# Altium PCB ROS_CAR.PcbDoc (part 12 of 13)
Units mil, origin at the board's own origin, x right, y up, seen from the top; angles counter-clockwise.
Board outline 3937.01 x 3937.01 mil, 2 copper layers (Top Layer, Bottom Layer); 201 components, 155 nets, 998 pads, 0 vias.
Unrouted connection lines stored in the file: 3.
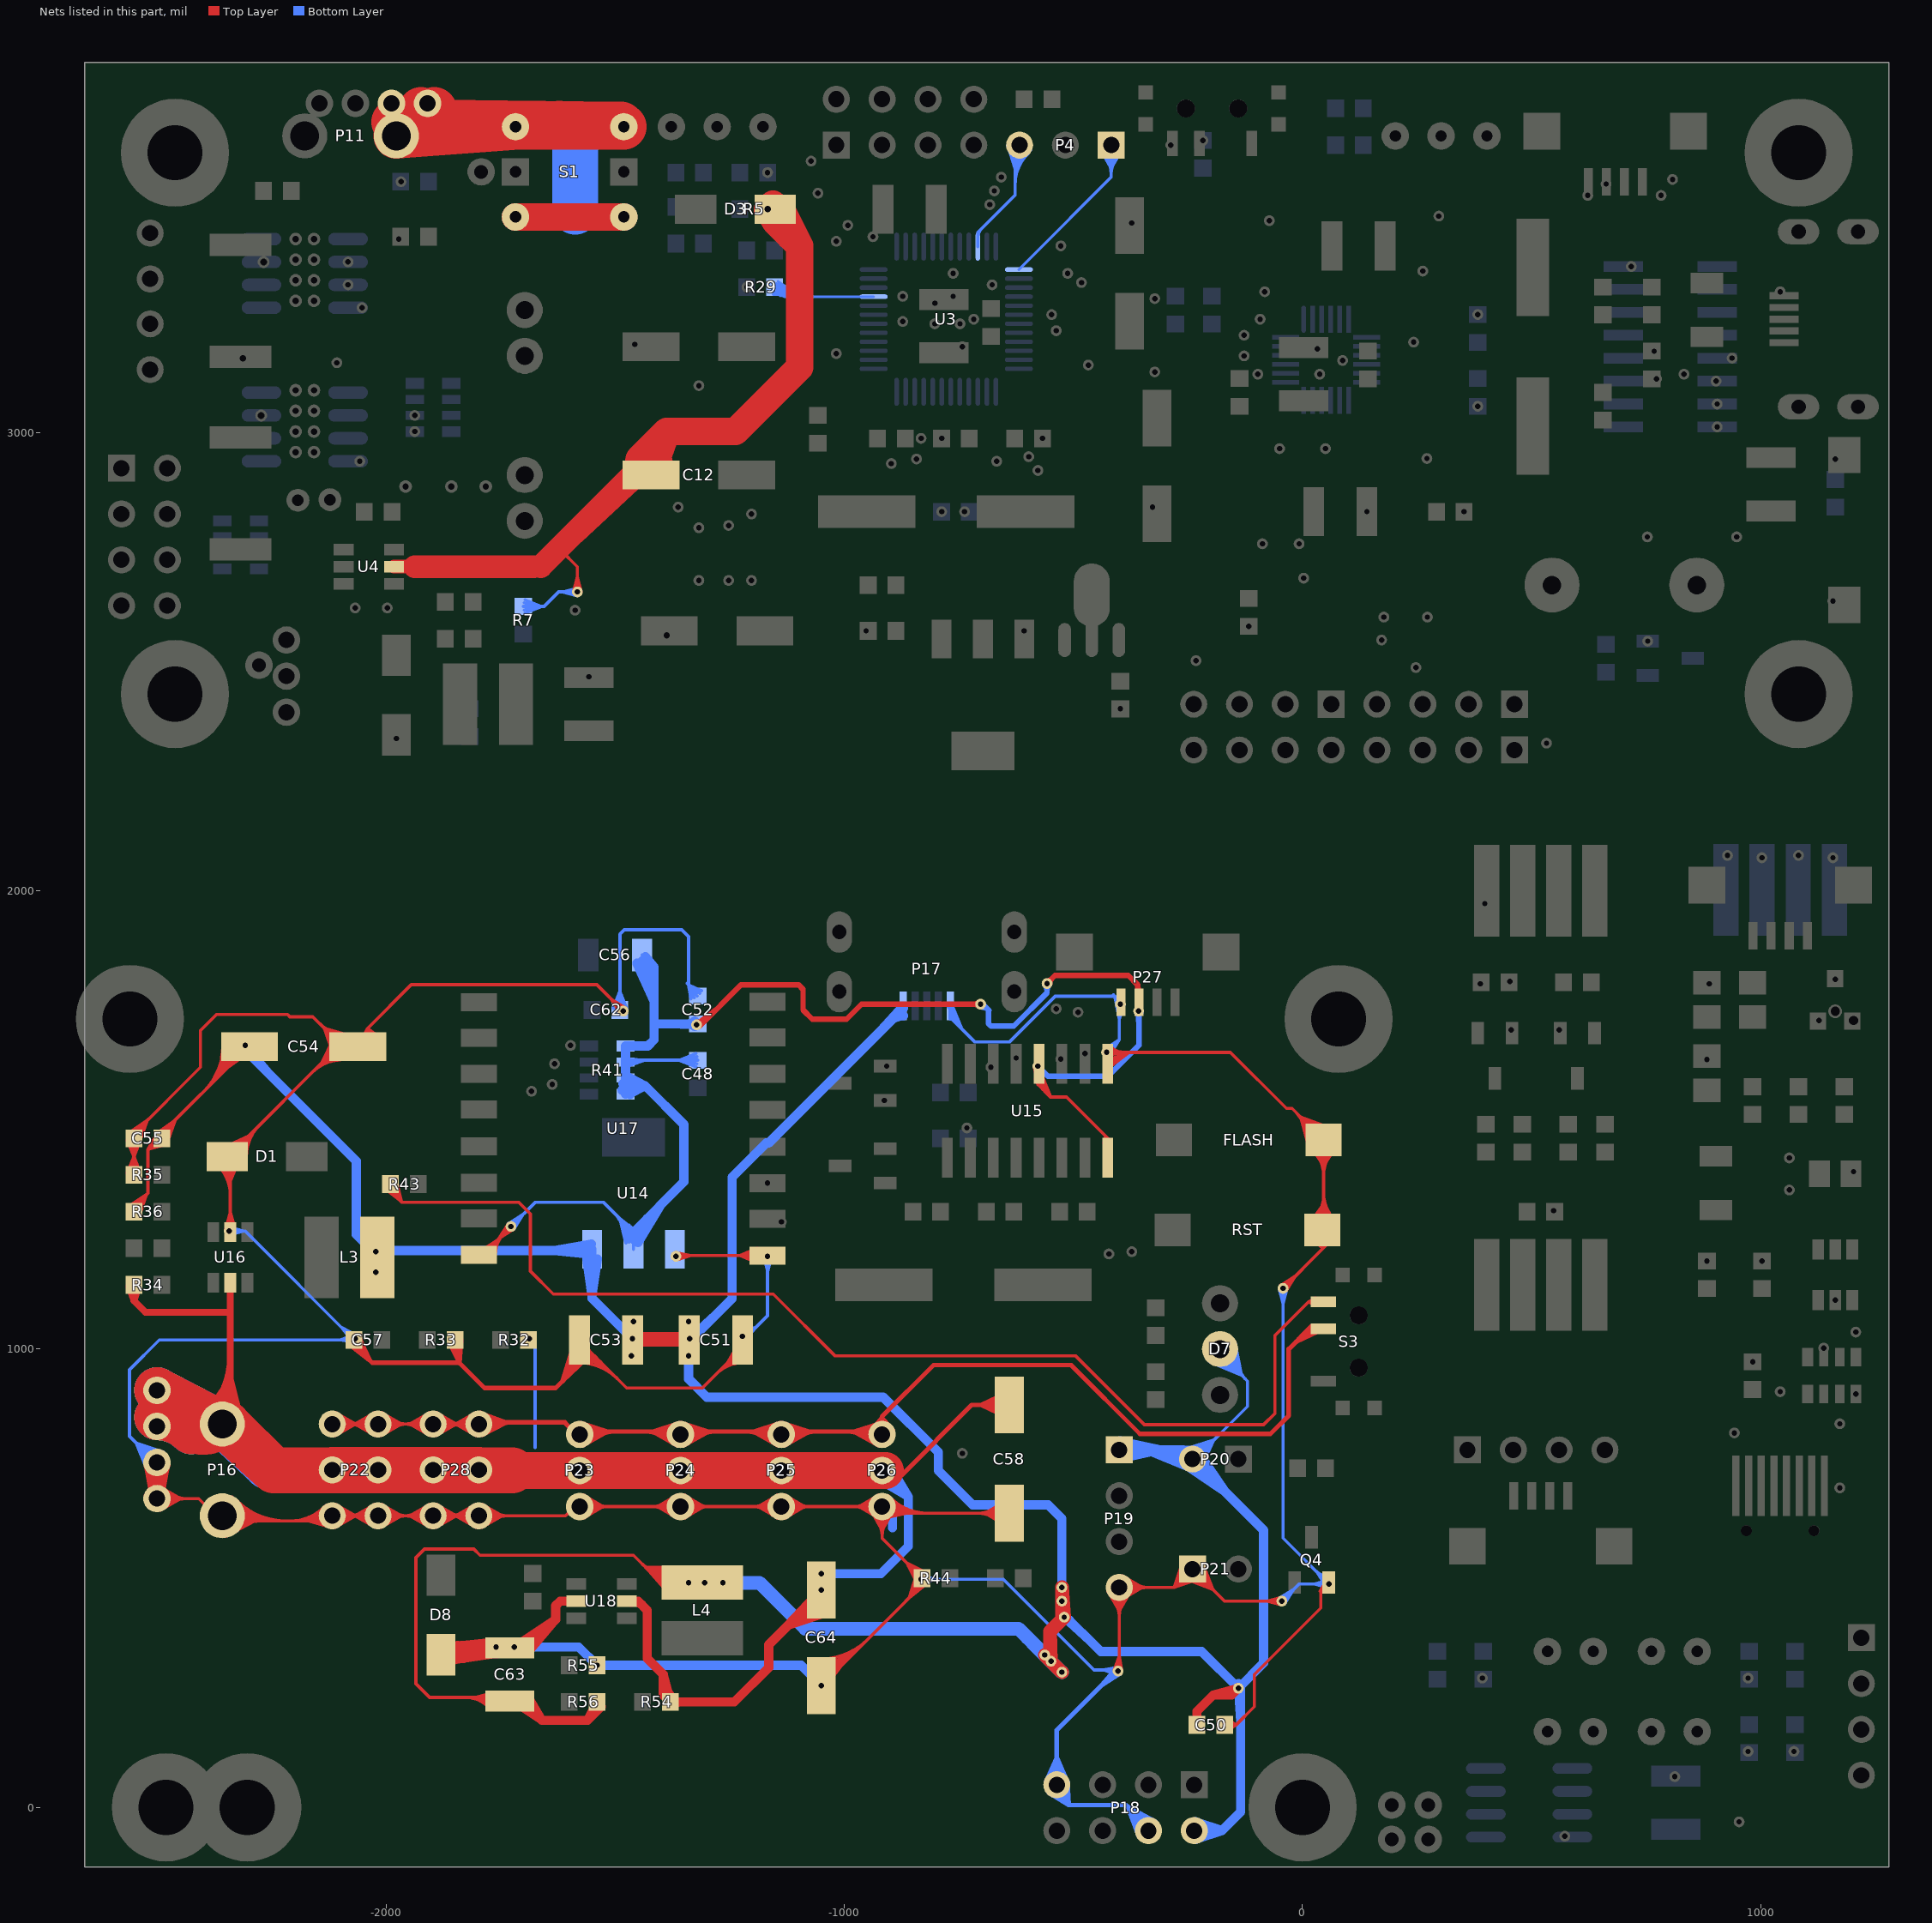
[diagram p12: the nets of this part, all layers, seen from the top]

## Nets (pads, with @x,y where several pads share a name; then routed paths per layer and width w, separated by ;. In a path a pad name is that pad's centre, name@x,y a point inside that pad or via, vN(x,y) a via of type N, cw(c..) or ccw(c..) an arc to the next point about the centre after c; other vN are vias at no path point) (continued)
SGND: (continued)
  Bottom Layer w7: -2549.54,799.54 ccw(c-2500,849.08) pad.0@-2500,779.02 ; -2543.46,793.46 cw(c-2584.39,752.52) pad.0@-2526.5,752.52 ; -2537.59,787.59 ccw(c-2500,825.18) pad.0@-2500,772.02 ; -2531.51,781.51 cw(c-2560.49,752.52) pad.0@-2519.5,752.52 ; -2525.64,775.64 ccw(c-2500,801.28) pad.0@-2500,765.02 ; pad.0@-2521.86,737.55 -2545.49,795.49 ; pad.0@-2515.44,740.6 -2545.49,795.49 ; pad.0@-2509.45,744.34 -2545.49,795.49 ; pad.0@-2503.95,748.69 -2545.49,795.49 ; pad.0@-2496.4,756.68 -2545.49,795.49 ; pad.0@-2492.37,762.42 -2545.49,795.49 ; pad.0@-2488.98,768.61 -2545.49,795.49 ; pad.0@-2486.29,775.2 -2545.49,795.49 ; pad.1@-2342.5,1257.5 -2307.5,1257.5 -2070,1020 -2495,1020 -2560,955 -2560,810 -2502.52,752.52 pad.0@-2500,752.52 -2545.49,795.49 ; pad.1@-2341.45,1249.26 -2309.69,1257.5 pad.1@-2341.45,1265.74 ; pad.1@-2336.62,1251.62 cw(c-2322.44,1237.44) -2322.44,1257.5 cw(c-2322.44,1277.56) pad.1@-2336.62,1263.38 ; -2093.6,1020 ccw(c-2093.6,1048.6) pad.1@-2073.38,1028.38 ; -2090.22,1040.22 ccw(c-2067.5,1062.95) pad.1@-2067.5,1030.81 ; -2081.53,1020 cw(c-2081.53,1008.47) pad.1@-2073.38,1016.62 ; -2078.27,1028.27 ccw(c-2067.5,1039.05) pad.1@-2067.5,1023.81 ; -2078.15,1028.15 cw(c-2083.8,1022.5) pad.1@-2075.81,1022.5 ; pad.1@-2073.47,1016.72 -2096.78,1046.78 ; pad.1@-2069.16,1030.64 -2100.62,1020 ; pad.1@-2067.92,1014.2 -2100.62,1020 ; pad.1@-2062.93,1029.44 -2096.78,1046.78 ; C62.2@-1504.23,1743.77 -1489.68,1780.29 ; C62.2@-1500.16,1751.45 ccw(c-1525.43,1776.73) -1489.69,1776.73 ccw(c-1453.94,1776.73) C62.2@-1479.21,1751.45 ; C62.2@-1497.45,1741.76 -1489.68,1780.29 ; C62.2@-1495.21,1746.5 ccw(c-1508.53,1759.83) -1489.69,1759.83 ccw(c-1470.84,1759.83) C62.2@-1484.16,1746.5 ; C62.2@-1490.81,1737.25 -1487.64,1770.16 ; C62.2@-1490.81,1737.44 -1486.93,1773.37 ; C62.2@-1489.68,1740 -1489.68,1905.32 -1480,1915 -1355,1915 -1340,1900 -1340,1795 ; C62.2@-1489.68,1740.98 -1489.68,1780.29 ; C62.2@-1489.68,1758.01 ccw(c-1461.99,1758.01) C62.2@-1481.57,1738.43 ; -1489.68,1774.91 ccw(c-1445.09,1774.91) C62.2@-1476.62,1743.38 ; C62.2@-1481.92,1741.76 -1489.68,1780.29 ; C62.2@-1475.14,1743.77 -1489.68,1780.29 ; C62.2@-1474.61,1740.11 -1489.68,1772.46 ; C62.2@-1474.62,1740.16 -1489.68,1771.8 ; C62.2@-1474.52,1739.81 -1487.64,1770.16 ; C62.2@-1474.42,1739.46 -1486.93,1773.37 ; -1342.83,1797.83 cw(c-1361.91,1778.75) C52.2@-1335.49,1773.3 ; -1336.58,1791.58 ccw(c-1320.98,1807.18) C52.2@-1320.98,1785.12 ; C52.2@-1334.53,1764.32 -1340,1795 ; -1333.65,1788.65 cw(c-1346.69,1775.61) C52.2@-1328.63,1771.89 ; C52.2@-1327.72,1766.36 -1340,1795 ; C52.2@-1325,1780 -1340,1795 ; C52.2@-1320.98,1770.32 -1340,1795 ; C52.2@-1315.45,1775.82 -1340,1795 ; C52.2@-1311.74,1781.88 -1340,1795 ; pad.1@-1226.14,1035.11 -1190.79,1049.21 ; pad.1@-1222.23,1027.77 -1190.79,1049.21 ; pad.1@-1222.23,1029.08 ccw(c-1222.23,1056.39) -1202.92,1037.08 ; pad.1@-1222.23,1036.08 ccw(c-1222.23,1080.29) -1190.97,1049.03 ; pad.1@-1216.83,1021.46 -1190.79,1049.21 ; pad.1@-1215,1025 -1167.5,1072.5 pad.1@-1167.5,1202.5 ; pad.1@-1175.74,1201.45 -1167.5,1169.69 pad.1@-1159.26,1201.45 ; pad.1@-1173.38,1196.62 cw(c-1187.56,1182.44) -1167.5,1182.44 cw(c-1147.44,1182.44) pad.1@-1161.62,1196.62 ; pad.1@-832.5,497.5 -652.5,497.5 -455,300 pad.1@-405,300 ; pad.1@-831.45,489.26 -799.69,497.5 pad.1@-831.45,505.74 ; pad.1@-826.62,491.62 cw(c-812.44,477.44) -812.44,497.5 cw(c-812.44,517.56) pad.1@-826.62,503.38 ; P17.1@-772.64,1746.37 -743.1,1698.1 ; P17.1@-768.82,1720.51 cw(c-768.82,1712.51) P17.1@-763.17,1718.17 ; P17.1@-764.85,1750.34 -743.1,1698.1 ; P17.1@-764.44,1724.88 ccw(c-751.32,1724.88) -760.6,1715.6 ; pad.1@-432.69,1653.99 -400.84,1674.16 ; pad.1@-430,1645 -400,1675 -400,1760 -410,1770 ; -428.6,300 cw(c-428.6,271.4) pad.1@-408.38,291.62 ; pad.1@-427.5,1647.5 -400.84,1674.16 ; pad.1@-427.5,1655.81 ccw(c-427.5,1675.88) -413.31,1661.69 ccw(c-399.12,1647.5) pad.1@-419.19,1647.5 ; pad.1@-421.01,1642.31 -400.84,1674.16 ; -416.53,300 ccw(c-416.53,311.53) pad.1@-408.38,303.38 ; -412.5,1772.5 cw(c-429.09,1755.91) pad.1@-405.76,1753.39 ; pad.1@-405.8,1752.08 -400,1719.57 ; pad.1@-405.07,1749.07 -410,1770 ; pad.1@-404.16,289.36 -435.51,300 ; pad.1@-403.38,1746.62 cw(c-411.53,1738.47) -400,1738.47 ; -403.15,1763.15 ccw(c-397.5,1768.8) pad.1@-397.5,1760.81 ; pad.1@-402.92,305.8 -435.51,300 ; pad.1@-402.5,297.5 -435.51,300 ; -400,1726.4 cw(c-371.4,1726.4) pad.1@-391.62,1746.62 ; pad.1@-391.8,1758.55 -410,1770 ; pad.1@-389.36,1750.83 -400,1719.57 ; pad.1@-50.74,1131.45 -42.5,1099.69 pad.1@-34.26,1131.45 ; pad.1@-50.19,456.49 -18.34,476.66 pad.1@-38.51,444.81 ; pad.1@-48.38,1126.62 cw(c-62.56,1112.44) -42.5,1112.44 cw(c-22.44,1112.44) pad.1@-36.62,1126.62 ; pad.1@-45,450 -7.5,487.5 pad.1@57.5,487.5 -42.5,587.5 pad.1@-42.5,1132.5 ; pad.1@-45,458.31 ccw(c-45,478.38) -30.81,464.19 ccw(c-16.62,450) pad.1@-36.69,450 ; pad.1@49.19,487.5 ccw(c29.12,487.5) 43.31,501.69 ccw(c57.5,515.88) pad.1@57.5,495.81 ; pad.1@51.01,482.31 30.84,514.16 pad.1@62.69,493.99 ; pad.1@51.62,481.62 ccw(c37.44,467.44) 37.44,487.5 ccw(c37.44,507.56) pad.1@51.62,493.38 ; pad.1@56.45,479.26 24.69,487.5 pad.1@56.45,495.74 ; -2100.62,1020 pad.1@-2067.5,1022.5 -2096.78,1046.78 ; -1489.68,1771.8 pad.1@-1482.5,1737.5 ; -1489.68,1771.8 -1490.78,1736.77 -1489.68,1772.46 ; -1489.68,1772.46 pad.1@-1482.5,1737.5 ; -1487.64,1770.16 pad.1@-1482.5,1737.5 ; -1486.93,1773.37 pad.1@-1482.5,1737.5 ; -743.1,1698.1 P17.1@-768.82,1748.5 -768.82,1723.82 -715,1670 -640,1670 -540,1770 -410,1770 ; -410,1770 pad.1@-397.5,1752.5 -400,1719.57
  Bottom Layer w10: P18.4@-560.22,54.33 -536.22,108.8 ; P18.4@-553.74,32.11 -510,5 ; P18.4@-553.56,66.62 ccw(c-595.44,108.49) -536.22,108.49 ccw(c-477.01,108.49) P18.4@-518.88,66.62 ; P18.4@-550.64,51.05 -536.22,108.8 ; P18.4@-547.55,40.18 -510,5 ; P18.4@-546.49,59.55 ccw(c-571.29,84.35) -536.22,84.35 ccw(c-501.15,84.35) P18.4@-525.95,59.55 ; P18.4@-536.22,24.75 cw(c-536.22,9.12) -525.17,20.17 ; P18.4@-522.8,54.84 -510,5 ; P18.4@-521.8,51.05 -536.22,108.8 ; P18.4@-512.75,56.38 -510,5 ; P18.4@-512.22,54.33 -536.22,108.8 ; -422.66,282.34 cw(c-402.5,262.17) pad.1@-402.5,290.69 ; pad.1@-407.3,302.33 -438.03,266.97 ; pad.1@-405,300 -536.22,168.78 -536.22,31.22 -510,5 ; pad.1@-402.5,297.5 -438.03,266.97 ; pad.1@-398.45,292.02 -438.03,266.97 ; -383,3 cw(c-436.73,-50.72) P18.6@-360.75,-50.72 ; -366.24,-13.76 ccw(c-336.22,16.25) P18.6@-336.22,-26.2 ; -365.93,-14.07 cw(c-402.59,-50.72) P18.6@-350.75,-50.72 ; P18.6@-357.3,-63.27 -381.7,1.7 ; P18.6@-348.13,-59.04 -381.7,1.7 ; P18.6@-326.3,-40.11 -381.7,1.7 ; P18.6@-320.82,-31.63 -381.7,1.7 ; -536.22,108.8 P18.4@-536.22,49.28 -510,5 ; -510,5 -385,5 -336.22,-43.78 P18.6@-336.22,-50.72 -381.7,1.7
  Bottom Layer w20: pad.1@-1760,350 -1579.68,350 pad.1@-1539.68,310 -1094.33,310 pad.1@-1050,265.67 ; -895,610 P26.1@-895,638.91
SIG: P22.5 P22.6 P23.3 P24.3 P25.3 P26.3 P28.5 P28.6 S3.2 | length 9681.6
  Top Layer w7: P22.6@-2117.48,836.38 -1808.62,836.38 P28.5@-1805,840 ; P22.6@-2117.23,831.36 -2066.95,836.38 ; P22.6@-2117.23,841.4 -2066.95,836.38 ; P22.6@-2116.05,824.44 -2066.95,836.38 ; P22.6@-2116.05,848.32 -2066.95,836.38 ; P22.6@-2113.9,817.69 -2066.95,836.38 ; P22.6@-2113.9,855.07 -2066.95,836.38 ; P22.6@-2110.78,811.23 -2066.95,836.38 ; P22.6@-2110.78,861.53 -2066.95,836.38 ; P22.6@-2104.03,822.92 cw(c-2071.54,790.44) -2071.54,836.38 cw(c-2071.54,882.31) P22.6@-2104.03,849.83 ; P22.6@-2099.08,817.97 cw(c-2054.64,773.54) -2054.64,836.38 cw(c-2054.64,899.21) P22.6@-2099.08,854.78 ; P22.5@-2035.88,817.97 ccw(c-2080.32,773.54) -2080.32,836.38 ccw(c-2080.32,899.21) P22.5@-2035.88,854.78 ; P22.5@-2030.93,822.92 ccw(c-2063.42,790.44) -2063.42,836.38 ccw(c-2063.42,882.31) P22.5@-2030.93,849.83 ; P22.5@-2024.18,811.23 -2068.01,836.38 ; P22.5@-2024.18,861.53 -2068.01,836.38 ; P22.5@-2021.06,817.69 -2068.01,836.38 ; P22.5@-2021.06,855.07 -2068.01,836.38 ; P22.5@-2018.91,824.44 -2068.01,836.38 ; P22.5@-2018.91,848.32 -2068.01,836.38 ; P22.5@-2017.73,831.36 -2068.01,836.38 ; P22.5@-2017.73,841.4 -2068.01,836.38 ; P22.5@-2017.23,831.36 -1966.95,836.38 ; P22.5@-2017.23,841.4 -1966.95,836.38 ; P22.5@-2016.05,824.44 -1966.95,836.38 ; P22.5@-2016.05,848.32 -1966.95,836.38 ; P22.5@-2013.9,817.69 -1966.95,836.38 ; P22.5@-2013.9,855.07 -1966.95,836.38 ; P22.5@-2010.78,811.23 -1966.95,836.38 ; P22.5@-2010.78,861.53 -1966.95,836.38 ; P22.5@-2004.03,822.92 cw(c-1971.54,790.44) -1971.54,836.38 cw(c-1971.54,882.31) P22.5@-2004.03,849.83 ; P22.5@-1999.08,817.97 cw(c-1954.64,773.54) -1954.64,836.38 cw(c-1954.64,899.21) P22.5@-1999.08,854.78 ; P28.6@-1915.88,817.97 ccw(c-1960.32,773.54) -1960.32,836.38 ccw(c-1960.32,899.21) P28.6@-1915.88,854.78 ; P28.6@-1910.93,822.92 ccw(c-1943.42,790.44) -1943.42,836.38 ccw(c-1943.42,882.31) P28.6@-1910.93,849.83 ; P28.6@-1904.18,811.23 -1948.01,836.38 ; P28.6@-1904.18,861.53 -1948.01,836.38 ; P28.6@-1901.06,817.69 -1948.01,836.38 ; P28.6@-1901.06,855.07 -1948.01,836.38 ; P28.6@-1898.91,824.44 -1948.01,836.38 ; P28.6@-1898.91,848.32 -1948.01,836.38 ; P28.6@-1897.73,831.36 -1948.01,836.38 ; P28.6@-1897.73,841.4 -1948.01,836.38 ; P28.6@-1897.23,831.36 -1846.95,836.38 ; P28.6@-1897.23,841.4 -1846.95,836.38 ; P28.6@-1896.05,824.44 -1846.95,836.38 ; P28.6@-1896.05,848.32 -1846.95,836.38 ; P28.6@-1893.9,817.69 -1846.95,836.38 ; P28.6@-1893.9,855.07 -1846.95,836.38 ; P28.6@-1890.78,811.23 -1846.95,836.38 ; P28.6@-1890.78,861.53 -1846.95,836.38 ; P28.6@-1884.03,822.92 cw(c-1851.54,790.44) -1851.54,836.38 cw(c-1851.54,882.31) P28.6@-1884.03,849.83 ; P28.6@-1879.08,817.97 cw(c-1834.64,773.54) -1834.64,836.38 cw(c-1834.64,899.21) P28.6@-1879.08,854.78 ; P28.5@-1815.88,817.97 ccw(c-1860.32,773.54) -1860.32,836.38 ccw(c-1860.32,899.21) P28.5@-1815.88,854.78 ; P28.5@-1810.93,822.92 ccw(c-1843.42,790.44) -1843.42,836.38 ccw(c-1843.42,882.31) P28.5@-1810.93,849.83 ; P28.5@-1804.18,811.23 -1848.01,836.38 ; P28.5@-1804.18,861.53 -1848.01,836.38 ; P28.5@-1801.06,817.69 -1848.01,836.38 ; P28.5@-1801.06,855.07 -1848.01,836.38 ; P28.5@-1798.91,824.44 -1848.01,836.38 ; P28.5@-1798.91,848.32 -1848.01,836.38 ; P28.5@-1797.73,831.36 -1848.01,836.38 ; P28.5@-1797.73,841.4 -1848.01,836.38 ; P28.5@-1797.48,836.38 -1848.01,836.38 ; P26.3@-942.38,822.94 -917.48,852.52 ; P26.3@-936.35,818.78 -917.48,852.52 ; P26.3@-935,820 -917.48,837.52 -917.48,852.52 ; P26.3@-929.82,815.88 -917.48,852.52 ; P26.3@-927.04,838.57 ccw(c-932.43,852.52) -917.48,852.52 ; P26.3@-922.97,814.25 -917.48,852.52 ; P26.3@-917.48,813.86 -917.48,852.52 ; P26.3@-911.99,814.25 -917.48,852.52 ; P26.3@-907.92,838.57 cw(c-902.53,852.52) -917.48,852.52 ; P26.3@-905.14,815.88 -917.48,852.52 ; P26.3@-898.61,818.78 -917.48,852.52 ; P26.3@-892.59,822.94 -917.48,852.52 ; S3.2@20,1050 S3.2@35,1050
  Top Layer w10: P28.5@-1805,840 -1610,840 -1590,820 P26.3@-935,820 ; P28.5@-1797.48,836.38 -1737.83,840 ; P28.5@-1796.59,850.88 -1737.83,840 ; P28.5@-1794.84,822.09 -1737.83,840 ; P28.5@-1793.91,860.64 -1737.83,840 ; P28.5@-1791,812.72 -1737.83,840 ; P28.5@-1787.21,826.11 cw(c-1753.66,792.56) -1753.66,840 ; P28.5@-1780.14,819.03 cw(c-1729.52,768.42) -1729.52,840 ; P28.5@-1780.14,853.72 ccw(c-1747.01,886.85) -1747.01,840 ; P23.3@-1577.48,813.86 -1517.08,820 ; P23.3@-1577.14,828.85 -1517.08,820 ; P23.3@-1574.83,838.72 -1517.08,820 ; P23.3@-1574.13,799.24 -1517.08,820 ; P23.3@-1569.88,790.04 -1517.08,820 ; P23.3@-1566.87,803.25 cw(c-1526.44,762.82) -1526.44,820 ; P23.3@-1559.8,796.18 cw(c-1502.3,738.68) -1502.3,820 ; P23.3@-1559.8,831.54 ccw(c-1531.95,859.39) -1531.95,820 ; -1432.66,820 cw(c-1432.66,738.68) P24.3@-1375.16,796.18 ; -1408.52,820 cw(c-1408.52,762.82) P24.3@-1368.09,803.25 ; -1403.01,820 ccw(c-1403.01,859.39) P24.3@-1375.16,831.54 ; P24.3@-1365.07,790.04 -1417.95,820 ; P24.3@-1360.83,799.24 -1417.95,820 ; P24.3@-1360.12,838.72 -1417.95,820 ; P24.3@-1357.82,828.85 -1417.95,820 ; P24.3@-1357.14,828.85 -1296.94,820 ; P24.3@-1354.84,838.72 -1296.94,820 ; P24.3@-1354.14,799.24 -1296.94,820 ; P24.3@-1349.9,790.03 -1296.94,820 ; P24.3@-1346.87,803.25 cw(c-1306.44,762.82) -1306.44,820 ; P24.3@-1339.8,796.18 cw(c-1282.3,738.68) -1282.3,820 ; P24.3@-1339.8,831.54 ccw(c-1311.95,859.39) -1311.95,820 ; -1212.66,820 cw(c-1212.66,738.68) P25.3@-1155.16,796.18 ; -1188.52,820 cw(c-1188.52,762.82) P25.3@-1148.09,803.25 ; -1183.01,820 ccw(c-1183.01,859.39) P25.3@-1155.16,831.54 ; P25.3@-1145.06,790.03 -1198.02,820 ; P25.3@-1140.82,799.24 -1198.02,820 ; P25.3@-1140.12,838.72 -1198.02,820 ; P25.3@-1137.82,828.85 -1198.02,820 ; P25.3@-1137.14,828.85 -1077.03,820 ; P25.3@-1134.84,838.72 -1077.03,820 ; P25.3@-1134.13,799.24 -1077.03,820 ; P25.3@-1129.89,790.04 -1077.03,820 ; P25.3@-1126.87,803.25 cw(c-1086.44,762.82) -1086.44,820 ; P25.3@-1119.8,796.18 cw(c-1062.3,738.68) -1062.3,820 ; P25.3@-1119.8,831.54 ccw(c-1091.95,859.39) -1091.95,820 ; -992.66,820 cw(c-992.66,738.68) P26.3@-935.16,796.18 ; -968.52,820 cw(c-968.52,762.82) P26.3@-928.09,803.25 ; -963.01,820 ccw(c-963.01,859.39) P26.3@-935.16,831.54 ; P26.3@-924.97,790.01 -978.79,820 ; P26.3@-920.78,799.23 -978.79,820 ; P26.3@-920.09,838.72 -978.79,820 ; P26.3@-917.81,828.85 -978.79,820 ; P26.3@-917.48,813.86 -978.79,820 ; -917.48,852.52 -805,965 -505,965 -355,815 -70,815 -30,855 -30,1000 S3.2@20,1050 ; -9.05,1020.95 cw(c30,981.9) S3.2@30,1037.13 ; 8.02,1038.02 cw(c30,1016.05) S3.2@30,1047.13 ; S3.2@25.97,1049.43 -14.41,1015.59 ; S3.2@30,1043.94 -14.41,1015.59 ; S3.2@33.29,1037.97 -14.41,1015.59 ; -1417.95,820 P24.3@-1357.48,813.86 -1296.94,820 ; -1198.02,820 P25.3@-1137.48,813.86 -1077.03,820
SIG_T: R43.1 S3.3 | length 2896.9
  Top Layer w7: R43.1@-2001.31,1349.1 -1966.24,1321.24 ; R43.1@-1996.51,1354.26 -1966.24,1321.24 ; R43.1@-1990.31,1359.02 -1966.24,1321.24 ; R43.1@-1990.31,1360 -1990.31,1345.31 -1965,1320 -1710,1320 -1685,1295 -1685,1170 -1635,1120 -1155,1120 -1020,985 -495,985 -345,835 -85,835 -60,860 -60,1030 12.99,1102.99 ; R43.1@-1983.39,1362.62 -1966.24,1321.24 ; R43.1@-1983.17,1355.87 ccw(c-1965.21,1347.96) -1979.09,1334.09 ; R43.1@-1976.76,1353.05 ccw(c-1955.16,1343.54) -1971.85,1326.85 ; R43.1@-1976.68,1364.8 -1966.24,1321.24 ; S3.3@23.44,1097.89 ccw(c12.99,1089.75) 12.99,1102.99 ; S3.3@23.44,1108.1 cw(c12.99,1116.24) 12.99,1102.99 ; S3.3@27.97,1094.93 12.99,1102.99 ; S3.3@27.97,1111.05 12.99,1102.99 ; S3.3@30,1102.99 12.99,1102.99 ; S3.3@45.75,1102.99 12.99,1102.99
SVCC3.3: C48.2 C52.1 C56.1 P27.3 pad.1@-357.5,1737.5 pad.1@-557.5,1797.5 pad.1@-577.5,1617.5 pad.1@-702.5,1752.5 pad.1@-1322.5,1707.5 pad.1@-1727.5,1267.5 R41.1 R41.2 R41.3 R41.4 U14.2 U15.4 U15.16 U17.8 | length 7705.2
  Top Layer w7: U17.8@-1797.48,1205.59 -1789.41,1205.59 pad.1@-1727.5,1267.5 -1754.16,1240.84 ; U17.8@-1789.28,1217 -1757.41,1237.59 ; U17.8@-1784.89,1211.43 -1757.41,1237.59 ; U17.8@-1777.8,1205.59 -1757.41,1237.59 ; U17.8@-1777.8,1221.78 ccw(c-1777.8,1232.81) U17.8@-1769.99,1225.01 ; U17.8@-1775.61,1205.59 cw(c-1742.3,1205.59) -1765.85,1229.15 ; U17.8@-1769.51,1201.63 -1757.41,1237.59 ; U17.8@-1768.61,1205.59 cw(c-1718.4,1205.59) -1753.9,1241.1 ; U17.8@-1762.6,1200.01 -1757.41,1237.59 ; U17.8@-1761.61,1205.59 cw(c-1694.5,1205.59) -1741.95,1253.05 ; pad.1@-1735.81,1267.5 cw(c-1755.88,1267.5) -1741.69,1253.31 cw(c-1727.5,1239.12) pad.1@-1727.5,1259.19 ; pad.1@-1733.99,1272.69 -1754.16,1240.84 ; pad.1@-1722.31,1261.01 -1754.16,1240.84 ; U15.4@-585.74,1616.45 -577.5,1584.69 U15.4@-569.26,1616.45 ; U15.4@-583.38,1611.62 cw(c-597.56,1597.44) -577.5,1597.44 cw(c-557.44,1597.44) U15.4@-571.62,1611.62 ; U15.4@-581.69,1585.93 -550,1550 ; U15.4@-580.74,1584.86 cw(c-588,1577.27) -577.5,1577.27 cw(c-571.85,1577.27) U15.4@-573.13,1582.77 ; U15.4@-580.55,1592.13 ccw(c-563.47,1588.24) -575.85,1575.85 ; pad.1@-577.5,1617.5 -577.5,1577.5 ; U15.4@-573.72,1590.57 ccw(c-548.87,1584.91) -566.89,1566.89 ; U15.4@-567.56,1594.57 -550,1550 ; U15.4@-566.9,1589.02 ccw(c-534.28,1581.59) -557.93,1557.93 ; U15.16@-433.3,1448.7 -430,1465 ; U15.16@-425,1417.64 -430,1422.64 -430,1465 ; U15.16@-425,1449.13 -430,1465 ; U15.16@-423.56,1457.32 cw(c-422.2,1465) -430,1465 ; U15.16@-417.95,1453.53 -430,1465 ; -577.5,1577.5 U15.4@-575,1590.87 ; -577.5,1577.5 -583.25,1589.82 -577.5,1577.5 ; -577.5,1577.5 -567.69,1586.91 -577.5,1577.5 ; -577.5,1577.5 U15.4@-575,1590.87 ; -577.5,1577.5 -550,1550 ; U15.4@-575,1590.87 -550,1550 ; -550,1550 -515,1550 -430,1465
  Top Layer w12: pad.1@-1322.5,1707.5 -1279.79,1740.21 ; pad.1@-1322.5,1713.31 ccw(c-1322.5,1751.48) -1295.51,1724.49 ; pad.1@-1315,1705 -1225,1795 -1100,1795 -1090,1785 -1090,1740 -1070,1720 -995,1720 -962.5,1752.5 pad.1@-702.5,1752.5 ; pad.1@-706.61,1748.39 ccw(c-716.53,1738.47) -716.53,1752.5 ccw(c-716.53,1766.53) pad.1@-706.61,1756.61 ; pad.1@-560,1795 -540,1815 -380,1815 -360,1795 ; pad.1@-557.5,1803.31 ccw(c-557.5,1817.34) -547.58,1807.42 ccw(c-537.66,1797.5) pad.1@-551.69,1797.5 ; P27.3@-360,1780 -360,1795 ; -360,1792.66 ccw(c-341.05,1792.66) P27.3@-354.45,1779.25 ; P27.3@-357.17,1776.54 -360,1795
  Bottom Layer w7: pad.1@-1732.69,1273.99 -1700.84,1294.16 ; pad.1@-1727.5,1267.5 -1700.84,1294.16 ; pad.1@-1727.5,1275.81 ccw(c-1727.5,1295.88) -1713.31,1281.69 ccw(c-1699.12,1267.5) pad.1@-1719.19,1267.5 ; pad.1@-1725,1270 -1675,1320 -1525,1320 -1460,1255 U14.2@-1460,1217.95 ; pad.1@-1721.01,1262.31 -1700.84,1294.16 ; -1502.57,1297.57 cw(c-1561.52,1238.62) U14.2@-1478.15,1238.62 ; -1490.62,1285.62 cw(c-1537.62,1238.62) U14.2@-1471.15,1238.62 ; -1478.67,1273.67 cw(c-1513.72,1238.62) U14.2@-1464.15,1238.62 ; U14.2@-1478.15,1238.09 -1470,1270 ; U14.2@-1476.63,1231.35 -1490.31,1285.31 ; U14.2@-1472.84,1251.46 ccw(c-1479.68,1258.31) U14.2@-1470,1258.31 ; U14.2@-1471.05,1237.08 -1470,1270 ; -1470,1262.2 ccw(c-1457.44,1262.2) U14.2@-1458.8,1249.71 ; R41.3@-1470,1625 -1464.68,1630.32 C48.2@-1320,1630.32 ; U14.2@-1469.92,1233.52 -1490.31,1285.31 ; R41.3@-1467.62,1632.88 -1435.7,1630.32 ; R41.3@-1467.48,1626.38 -1435.7,1630.32 ; -1466.72,1261.72 cw(c-1489.82,1238.62) U14.2@-1457.15,1238.62 ; R41.3@-1466.03,1620.04 -1435.7,1630.32 ; U14.2@-1465,1235 -1470,1240 -1470,1270 ; U14.2@-1464.03,1237.61 -1470,1270 ; U14.2@-1463.57,1236.49 -1490.31,1285.31 ; R41.3@-1462.88,1621.78 cw(c-1442.28,1601.18) -1442.28,1630.32 ; U14.2@-1458.04,1256.67 cw(c-1456.59,1270) -1470,1270 ; U14.2@-1456.6,1241.01 -1490.31,1285.31 ; U14.2@-1456.13,1240.13 -1470,1270 ; U14.2@-1451.3,1245.6 -1490.31,1285.31 ; U14.2@-1450.1,1243.76 -1470,1270 ; U14.2@-1446.59,1250.86 -1490.31,1285.31 ; U14.2@-1444.89,1248.69 -1470,1270 ; C56.1@-1444.38,1835.47 -1415,1833.66 ; C56.1@-1443.94,1828.25 -1415,1833.66 ; C56.1@-1443.11,1842.41 -1415,1833.66 ; C56.1@-1441.34,1846.81 -1415,1833.66 ; C56.1@-1441.34,1860 -1415,1833.66 ; C56.1@-1438.88,1850.87 -1415,1833.66 ; C56.1@-1435.64,1836.54 cw(c-1427.24,1821.37) -1414.97,1833.64 ; C56.1@-1434.1,1856.06 -1415,1833.66 ; C56.1@-1428.06,1860.04 -1415,1833.66 ; C56.1@-1422.59,1846.81 ccw(c-1409.18,1846.81) -1418.67,1837.33 ; -1415,1710 -1414.68,1709.68 ; C48.2@-1331.45,1619.84 ccw(c-1356.73,1594.57) -1356.73,1630.32 ccw(c-1356.73,1666.06) C48.2@-1331.45,1640.79 ; C48.2@-1326.5,1624.79 ccw(c-1339.83,1611.47) -1339.83,1630.32 ccw(c-1339.83,1649.16) C48.2@-1326.5,1635.84 ; C48.2@-1323.77,1615.77 -1360.29,1630.32 ; C48.2@-1323.77,1644.86 -1360.29,1630.32 ; C48.2@-1321.76,1622.55 -1360.29,1630.32 ; C48.2@-1321.76,1638.08 -1360.29,1630.32 ; C48.2@-1320.98,1630.32 -1360.29,1630.32 ; -1490.31,1285.31 -1460,1238.62 -1470,1270
  Bottom Layer w12: pad.1@-702.5,1746.69 cw(c-702.5,1720.59) -684.04,1739.04 ; pad.1@-702.5,1752.5 -685,1740 ; pad.1@-700,1755 -685,1740 ; pad.1@-577.5,1611.69 cw(c-577.5,1597.66) -567.58,1607.58 cw(c-557.66,1617.5) pad.1@-571.69,1617.5 ; pad.1@-577.5,1617.5 -555,1595 ; pad.1@-575,1622.36 -575,1615 -555,1595 ; pad.1@-561.61,1793.39 cw(c-571.53,1783.47) -557.5,1783.47 cw(c-543.47,1783.47) pad.1@-553.39,1793.39 ; pad.1@-361.61,1733.39 cw(c-372.34,1722.66) -357.17,1722.66 ; -357.17,1689.69 pad.1@-357.5,1737.5 -357.17,1737.17 -357.17,1662.83 -425,1595 -555,1595 ; -357.17,1724.28 cw(c-344.28,1724.28) pad.1@-353.39,1733.39 ; -685,1740 -685,1710 -680,1705 -630,1705 -557.5,1777.5 ; -557.5,1777.5 pad.1@-557.5,1797.5 -557.5,1777.5
  Bottom Layer w20: R41.1@-1485.29,1565.03 cw(c-1468.56,1555.98) -1468.56,1575 ; -1483.56,1579.49 ccw(c-1474.66,1586.06) -1474.66,1575 ; R41.1@-1469.29,1556.38 -1435,1575 ; R41.4@-1469.29,1661.38 -1428.62,1661.38 ; U14.2@-1468.72,1246.35 -1401.23,1313.77 ; R41.1@-1467.7,1555.52 cw(c-1435,1537.82) -1435,1575 ; U14.2@-1460,1238.62 -1401.23,1313.77 ; U14.2@-1460,1255 -1350,1365 -1350,1490 -1435,1575 ; C56.1@-1452.81,1842.53 -1415,1758.66 ; U14.2@-1450.4,1232.02 -1401.23,1313.77 ; C56.1@-1450,1838.15 cw(c-1534.49,1753.66) -1415,1753.66 ; U14.2@-1448.35,1238.62 cw(c-1380.67,1238.62) -1428.53,1286.47 ; C56.1@-1444.41,1834.96 -1415,1833.66 ; C56.1@-1435.85,1852.3 cw(c-1486.2,1801.95) -1415,1801.95 ; C56.1@-1433.71,1856.39 -1415,1833.66 ; C56.1@-1429.4,1849.53 -1415,1758.66 ; -1414.68,1709.68 C52.1@-1320,1709.68 ; -1399.29,1709.68 C52.1@-1320.98,1709.68 ; C52.1@-1326.86,1703.81 ccw(c-1341.04,1689.63) -1341.04,1709.68 ccw(c-1341.04,1729.74) C52.1@-1326.86,1715.56 ; R41.1@-1477.48,1556.38 -1477.48,1575 ; R41.1@-1477.48,1556.38 R41.2@-1477.48,1591.38 -1477.48,1575 ; R41.1@-1477.48,1556.38 -1477.48,1575 ; R41.1@-1477.48,1556.38 R41.4@-1477.48,1661.38 -1428.62,1661.38 ; -1477.48,1575 -1435,1575 ; -1435,1575 cw(c-1435,1615.39) -1467.48,1591.38 -1435,1575 ; -1428.62,1661.38 -1415,1675 -1415,1833.66 ; -1415,1758.66 -1441.34,1846.81 -1415,1833.66 ; -1394.44,1709.68 pad.1@-1322.5,1707.5 -1394.44,1709.68
SVCC5: C50.1 C51.2 C53.1 C54.1 C55.2 C63.1 D7.2 L3.2 L4.2 P17.5 P18.5 P19.1 P20.2 pad.1@-140,260 pad.1@-520,415 pad.1@-525,295 pad.1@-525,450 pad.1@-525,480 pad.1@-548.9,318.9 pad.1@-562.5,332.5 pad.1@-1265,490 pad.1@-1305,490 pad.1@-1337.5,1022.5 pad.1@-1340,490 pad.1@-1340,985 pad.1@-1340,1060 pad.1@-1460,1060 pad.1@-1462.5,1022.5 pad.1@-1465,985 pad.1@-2022.5,1167.5 pad.1@-2022.5,1212.5 pad.1@-2307.5,1662.5 R36.1 R56.1 U14.3 | length 20749.4
  Top Layer w7: R36.1@-2560.49,1311.74 -2523.1,1336.9 ; R36.1@-2556.11,1306.22 -2523.1,1336.9 ; R36.1@-2550.31,1300 -2550.31,1309.69 -2520,1340 ; R36.1@-2550.31,1300.98 -2523.1,1336.9 ; R36.1@-2550.31,1315.79 ccw(c-2550.31,1330.53) -2539.89,1320.11 ; R36.1@-2543.71,1296.83 -2523.1,1336.9 ; R36.1@-2542.51,1301.16 cw(c-2505.17,1302.01) -2531.58,1328.42 ; R36.1@-2537.2,1294.1 -2523.1,1336.9 ; R36.1@-2535.51,1301.32 cw(c-2482.53,1302.52) -2520,1340 ; -2512.13,1442.87 cw(c-2491.84,1422.58) C55.2@-2490.15,1451.22 ; -2510.51,1444.49 ccw(c-2525.03,1459.02) C55.2@-2504.49,1459.02 ; C55.2@-2500.93,1468.65 -2520,1435 ; C55.2@-2499.98,1471.63 -2460.77,1499.23 ; C55.2@-2495.51,1466.18 -2460.77,1499.23 ; C55.2@-2495.13,1464.61 -2520,1435 ; C55.2@-2489.68,1459.02 -2520,1435 ; C55.2@-2489.68,1460.98 -2460.77,1499.23 ; C55.2@-2489.68,1475.79 ccw(c-2489.68,1489.01) -2480.34,1479.66 ; C55.2@-2488.88,1460.98 cw(c-2464.4,1460.98) C55.2@-2481.71,1478.29 ; C55.2@-2485.48,1452.44 -2520,1435 ; C55.2@-2483.09,1456.8 -2460.77,1499.23 ; C55.2@-2482.88,1445.86 -2520,1435 ; C55.2@-2481.88,1460.98 cw(c-2440.5,1460.98) -2469.76,1490.24 ; C55.2@-2476.64,1453.98 -2460.77,1499.23 ; C55.2@-2474.88,1460.98 cw(c-2416.6,1460.98) -2457.81,1502.19 ; -2396.65,1563.35 ccw(c-2493.31,1660) C54.1@-2356.62,1660 ; -2384.7,1575.3 ccw(c-2469.41,1660) C54.1@-2349.62,1660 ; -2372.75,1587.25 ccw(c-2445.51,1660) C54.1@-2342.62,1660 ; -2360.8,1599.2 ccw(c-2421.61,1660) C54.1@-2335.62,1660 ; C54.1@-2356.56,1661.79 -2345.56,1614.44 ; C54.1@-2349.42,1662.89 -2345.56,1614.44 ; -2348.85,1611.15 ccw(c-2397.71,1660) -2328.62,1660 -2345.56,1614.44 ; C54.1@-2342.31,1662.94 -2345.56,1614.44 ; -2336.9,1623.1 ccw(c-2373.81,1660) C54.1@-2321.62,1660 ; C54.1@-2335.34,1661.96 -2345.56,1614.44 ; C54.1@-2328.76,1631.24 ccw(c-2360.02,1662.5) C54.1@-2315.81,1662.5 ; C54.1@-2322.26,1657.1 -2345.56,1614.44 ; C54.1@-2316.81,1643.19 ccw(c-2336.12,1662.5) C54.1@-2308.81,1662.5 ; C54.1@-2316.34,1653.28 -2345.56,1614.44 ; C54.1@-2315.8,1662.1 C54.1@-2310.99,1648.61 ; C54.1@-2314.86,1666.36 C54.1@-2328.57,1631.23 ; C54.1@-2314.79,1666.49 C54.1@-2330.02,1629.98 ; C54.1@-2314.49,1667 C54.1@-2330.56,1634.39 ; C54.1@-2306.3,1643.1 -2345.56,1614.44 ; C54.1@-2305,1655 -2500,1460 -2500,1455 -2520,1435 ; C54.1@-2301.72,1656.53 C54.1@-2330.56,1634.39 ; C54.1@-2301.2,1657.08 C54.1@-2330.02,1629.98 ; C54.1@-2301.16,1657.12 C54.1@-2328.57,1631.23 ; C54.1@-2300.37,1658.23 C54.1@-2310.99,1648.61 ; -1826.87,240 cw(c-1826.87,165.77) C63.1@-1774.38,218.26 ; -1809.97,240 cw(c-1809.97,182.67) C63.1@-1769.43,223.21 ; -1793.07,240 cw(c-1793.07,199.57) C63.1@-1764.48,228.16 ; -1787.9,240 ccw(c-1787.9,259.12) C63.1@-1774.38,245.6 ; C63.1@-1768.19,214.1 -1804.9,240 ; C63.1@-1764.57,220.21 -1804.9,240 ; C63.1@-1761.98,226.75 -1804.9,240 ; C63.1@-1761.41,251.25 -1804.9,240 ; C63.1@-1760.71,231.93 -1804.9,240 ; C63.1@-1760.18,244.25 -1804.9,240 ; C63.1@-1760.06,237.22 -1804.9,240 ; C63.1@-1740,240 -1905,240 -1935,270 -1935,545 -1916.25,563.75 -1808.75,563.75 -1795,550 -1460,550 -1400,490 ; -1440.08,530.08 ccw(c-1402.48,567.67) L4.2@-1377.26,520.87 ; -1433.43,523.43 ccw(c-1397.83,559.03) L4.2@-1373.94,514.71 ; -1426.78,516.78 ccw(c-1393.17,550.38) L4.2@-1370.62,508.54 ; -1420.13,510.13 ccw(c-1388.51,541.74) L4.2@-1367.3,502.38 ; -1413.48,503.47 ccw(c-1383.85,533.1) L4.2@-1363.98,496.22 ; -1406.82,496.82 ccw(c-1379.2,524.45) L4.2@-1360.66,490.06 ; -1400.17,490.17 ccw(c-1374.54,515.81) L4.2@-1357.34,483.89 ; L4.2@-1394.89,494.59 cw(c-1400,495.13) -1400,490 ; L4.2@-1394.62,485.44 ccw(c-1400,484.55) -1400,490 ; L4.2@-1381.37,463.79 -1433.67,523.67 ; L4.2@-1376.22,468.72 -1433.67,523.67 ; L4.2@-1371.56,474.04 -1433.67,523.67 ; L4.2@-1367.42,479.73 -1433.67,523.67 ; L4.2@-1363.8,485.74 -1433.67,523.67 ; L4.2@-1358.96,496.49 -1433.67,523.67 ; L4.2@-1356.85,503.18 -1433.67,523.67 ; L4.2@-1355.34,510.05 -1433.67,523.67 ; L4.2@-1354.44,517.07 -1433.67,523.67 ; L4.2@-1354.17,524.19 -1433.67,523.67 ; L4.2@-1345.88,484.12 ccw(c-1360.06,469.94) -1360.06,490 ccw(c-1360.06,510.06) L4.2@-1345.88,495.88 ; L4.2@-1341.05,481.76 -1372.81,490 L4.2@-1341.05,498.24 ; pad.1@-1340,490 -1400,490 ; -2520,1340 -2520,1435 ; -2345.56,1614.44 C54.1@-2310.99,1648.61 ; C54.1@-2330.56,1634.39 pad.1@-2307.5,1662.5 ; C54.1@-2330.02,1629.98 pad.1@-2307.5,1662.5 ; C54.1@-2328.57,1631.23 pad.1@-2307.5,1662.5 ; C54.1@-2310.99,1648.61 pad.1@-2307.5,1662.5 ; -1400,490 -1361.78,496.89 -1400,490 ; -1400,490 -1361.47,485.13 -1400,490 ; -1400,490 -1363.66,503.68 -1400,490 ; -1400,490 -1362.99,478.25 -1400,490 ; -1400,490 -1366.79,510.12 -1400,490 ; -1400,490 -1365.77,471.66 -1400,490 ; -1400,490 -1371.16,516.01 -1400,490 ; -1400,490 -1369.83,465.55 -1400,490 ; -1400,490 -1376.78,521.12 -1400,490 ; -1400,490 -1375.17,460.14 -1400,490
  Top Layer w20: C63.1@-1730,231.93 -1701.93,231.93 -1660,190 ; C63.1@-1707.62,222.16 -1660,190 ; C63.1@-1699.29,219.09 cw(c-1699.29,194.48) C63.1@-1681.88,211.88 ; C63.1@-1699.29,231.93 -1660,190 ; C63.1@-1689,239.6 -1660,190 ; C63.1@-1686.46,231.93 ccw(c-1649.1,231.93) -1675.52,205.52 ; -1550.65,199.35 ccw(c-1565.94,214.64) R56.1@-1546.97,225.03 ; R56.1@-1539.69,229.02 -1560,190 ; R56.1@-1530,220 -1560,190 ; pad.1@-1462.5,1022.5 -1449.17,1025 C53.1@-1460,1025 ; pad.1@-525,420 pad.1@-520,415 ; C50.1@-236.19,186.86 ccw(c-250.37,201.04) -230.32,201.04 ccw(c-210.26,201.04) C50.1@-224.44,186.86 ; C50.1@-230.32,180 -230.32,209.68 ; C50.1@-230.32,180.98 -230.32,209.68 ; -180.59,245 ccw(c-180.59,300.59) pad.1@-141.28,261.28 ; -1660,190 -1560,190 ; -230.32,209.68 -195,245 ; -195,245 pad.1@-140,260 ; -195,245 -155,245 ; -155,245 pad.1@-140,260 ; -155,245 pad.1@-140,260 ; -155,245 pad.1@-140,260
  Top Layer w30: C53.1@-1450.91,1020 C51.2@-1338.07,1020 C53.1@-1461.93,1020 C51.2@-1349.09,1020 ; C53.1@-1441.37,1020 pad.1@-1337.5,1022.5 ; pad.1@-562.5,332.5 pad.1@-525,295 ; pad.1@-550.57,320.57 -550.57,384.43 ; pad.1@-548.9,318.9 -550.57,384.43 ; pad.1@-1462.5,1022.5 -1358.63,1020 pad.1@-1337.5,1022.5 ; pad.1@-1462.5,1022.5 C51.2@-1360.47,1020 ; pad.1@-1462.5,1022.5 C51.2@-1360.46,1020 ; C53.1@-1439.67,1021.94 pad.1@-1337.5,1022.5 ; C53.1@-1439.67,1021.94 pad.1@-1337.5,1022.5 ; C53.1@-1439.66,1021.95 pad.1@-1337.5,1022.5 ; C51.2@-1360.46,1020 pad.1@-1337.5,1022.5 ; C51.2@-1360.47,1020 pad.1@-1337.5,1022.5 ; pad.1@-1337.5,1022.5 -1439.53,1020 pad.1@-1337.5,1022.5 ; -550.57,384.43 pad.1@-520,415 ; pad.1@-525,480 pad.1@-520,415 ; pad.1@-525,480 pad.1@-520,415 ; pad.1@-525,480 -525,420 pad.1@-525,480
  Bottom Layer w7: P20.2@-252.87,782.62 -193.68,801.32 ; P20.2@-250.34,775.97 -193.68,801.32 ; P20.2@-247.1,769.71 -193.68,801.32 ; P20.2@-243.19,763.88 -193.68,801.32 ; P20.2@-240,760 -193.68,801.32 ; P20.2@-240,772.03 ccw(c-240,813.14) -210.93,784.07 ; P20.2@-240,779.03 ccw(c-240,837.03) -198.98,796.02 ; P20.2@-240,786.03 ccw(c-240,860.93) -187.03,807.97 ; P20.2@-237.5,757.5 -120,875 -120,930 -180,990 D7.2@-180,1000 ; P20.2@-236.5,756.39 -193.68,801.32 ; P20.2@-231.16,751.84 -193.68,801.32 ; P20.2@-225.31,747.91 -193.68,801.32 ; P20.2@-220.97,760 cw(c-187.11,760) -211.05,783.95 ; P20.2@-218.99,744.64 -193.68,801.32 ; P20.2@-213.97,760 cw(c-163.21,760) -199.1,795.9 ; D7.2@-201.26,971.11 -133.52,943.52 ; D7.2@-198.23,977.62 -133.52,943.52 ; D7.2@-194.62,983.73 -133.52,943.52 ; D7.2@-190.46,989.43 -133.52,943.52 ; D7.2@-185.8,994.68 -133.52,943.52 ; D7.2@-180,964.13 cw(c-180,901.67) -135.84,945.84 ; D7.2@-180,971.13 cw(c-180,925.57) -147.79,957.79 ; D7.2@-173.66,1004.67 -133.52,943.52 ; D7.2@-167.62,1008.23 -133.52,943.52 ; D7.2@-165.3,997.75 ccw(c-126.81,991.87) -154.34,964.34 ; D7.2@-161.23,1011.22 -133.52,943.52 ; D7.2@-158.38,996.7 ccw(c-109.85,989.28) -144.56,954.56 ; D7.2@-154.53,1013.59 -133.52,943.52 ; D7.2@-151.46,995.64 ccw(c-92.88,986.69) -134.78,944.78 ; D7.2@-147.56,1015.31 -133.52,943.52 ; D7.2@-144.54,994.58 ccw(c-75.91,984.1) -125,935
  Bottom Layer w20: pad.1@-2305.69,1662.5 ccw(c-2277.17,1662.5) -2297.34,1642.34 ; -2256.95,1601.95 pad.1@-2307.5,1662.5 -2307.5,1652.5 -2065,1410 -2065,1250 ; -2034.13,1219.13 ccw(c-2022.5,1230.75) pad.1@-2022.5,1214.31 ; pad.1@-2015,1215 -1565,1215 U14.3@-1560,1210 ; -1950.05,1215 pad.1@-2022.5,1212.5 ; -1585.81,1215 ccw(c-1585.81,1253.22) U14.3@-1558.79,1226.19 ; U14.3@-1562.18,1196.45 -1550.55,1115.63 ; U14.3@-1558.79,1189.04 cw(c-1578.69,1169.15) -1550.55,1169.15 cw(c-1522.42,1169.15) U14.3@-1542.31,1189.04 ; U14.3@-1551.79,1229.54 -1632.74,1215 ; U14.3@-1550.96,1206.31 -1632.74,1215 ; U14.3@-1550.55,1197.28 -1550.55,1115.63 ; U14.3@-1538.93,1196.45 -1550.55,1115.63 ; pad.1@-1466.28,986.28 ccw(c-1481.44,1001.44) -1460,1001.44 ; pad.1@-1460,1058.01 pad.1@-1465,985 ; pad.1@-1337.5,1024.31 ccw(c-1337.5,1040.75) -1325.87,1029.13 ; pad.1@-1335,1020 -1245,1110 -1245,1375 -1170,1450 -1165,1450 -871.18,1743.82 P17.5@-871.18,1748.5 -919.65,1695.35 ; -1280.88,1074.12 pad.1@-1337.5,1022.5 ; -899.88,1715.12 cw(c-871.18,1686.42) P17.5@-871.18,1727.01 ; -525,431.44 ccw(c-503.56,431.44) pad.1@-518.72,416.28 ; pad.1@-525,490.06 pad.1@-520,415 ; pad.1@-520,413.19 cw(c-520,396.75) -508.37,408.37 ; -463.51,363.51 pad.1@-520,415 ; P19.1@-400,780 -260,780 -85,605 -85,315 pad.1@-140,260 ; P19.1@-397.87,760.59 -310.47,780 P19.1@-397.87,799.41 ; P19.1@-386.19,766.19 cw(c-352.86,732.86) -352.86,780 cw(c-352.86,827.14) P19.1@-386.19,793.81 ; -335.43,780 cw(c-335.43,664.57) P20.2@-253.81,746.19 ; -287.14,780 cw(c-287.14,712.86) P20.2@-239.67,760.33 ; P20.2@-252.42,744.93 -168.05,688.05 ; P20.2@-245.71,741.32 -338.89,780 ; P20.2@-240,740.47 cw(c-240,693.33) -206.66,726.66 cw(c-173.33,760) P20.2@-220.47,760 ; P20.2@-238,779.42 -338.89,780 ; P18.5@-236.22,-50.72 -175.72,-50.72 ; P18.5@-233.07,-70 -175.72,-50.72 ; P18.5@-233.07,-31.45 -175.72,-50.72 ; P20.2@-224.93,772.42 -168.05,688.05 ; P18.5@-222.41,-64.53 cw(c-189.08,-97.87) -189.08,-50.72 cw(c-189.08,-3.58) P18.5@-222.41,-36.92 ; pad.1@-141.28,258.72 cw(c-156.44,243.56) -135,243.56 ; pad.1@-140,270 -135,265 -135,-10 -175.72,-50.72 ; -135,187.52 pad.1@-140,260 ; -2065,1250 pad.1@-2022.5,1212.5 ; -2065,1250 -2022.5,1207.5 pad.1@-2022.5,1167.5 pad.1@-2022.5,1212.5 ; -1632.74,1215 U14.3@-1550.55,1217.95 -1550.55,1110.55 pad.1@-1462.5,1022.5 ; pad.1@-1465,985 pad.1@-1462.5,1022.5 ; pad.1@-1465,985 pad.1@-1460,990 ; pad.1@-1462.5,1022.5 pad.1@-1460,990 ; pad.1@-1462.5,1022.5 pad.1@-1460,1060 pad.1@-1460,990 ; pad.1@-1337.5,1022.5 pad.1@-1340,985 -1340,950.49 pad.1@-1337.5,1022.5 ; pad.1@-1337.5,1022.5 pad.1@-1340,1060 -1340,935 -1300,895 -915,895 -795,775 -795,735 -720,660 -555,660 -525,630 pad.1@-525,425 ; pad.1@-525,425 pad.1@-525,450 ; pad.1@-525,425 pad.1@-525,450 ; pad.1@-525,425 pad.1@-525,480 pad.1@-520,415 ; pad.1@-525,425 -440,340 -220,340 pad.1@-140,260 ; pad.1@-525,450 pad.1@-520,415 ; pad.1@-525,450 pad.1@-520,415 ; -338.89,780 P20.2@-240,760 -168.05,688.05
  Bottom Layer w30: pad.1@-1340,490 -1185,490 -1085,390 -620,390 ; -600.45,370.45 pad.1@-525,295 -620,390 ; pad.1@-562.5,332.5 -620,390 ; pad.1@-548.9,318.9 -620,390
SWCLK: P4.1 U3.37 | length 980.8
  Bottom Layer w7: U3.37@-619.02,3355.35 -597.48,3376.89 -597.48,3377.09 -417.48,3557.09 P4.1@-417.48,3627.09 -417.48,3576.56 ; P4.1@-442.63,3620.38 -417.48,3576.56 ; P4.1@-436.17,3623.5 -417.48,3576.56 ; P4.1@-435.88,3608.68 cw(c-480.32,3564.25) -417.48,3564.25 cw(c-354.64,3564.25) P4.1@-399.08,3608.68 ; P4.1@-430.93,3613.63 cw(c-463.42,3581.15) -417.48,3581.15 cw(c-371.54,3581.15) P4.1@-404.03,3613.63 ; P4.1@-429.42,3625.66 -417.48,3576.56 ; P4.1@-422.5,3626.84 -417.48,3576.56 ; P4.1@-412.46,3626.84 -417.48,3576.56 ; P4.1@-405.54,3625.66 -417.48,3576.56 ; P4.1@-398.79,3623.5 -417.48,3576.56 ; P4.1@-392.33,3620.38 -417.48,3576.56
SWDIO: P4.3 U3.34 | length 994.8
  Bottom Layer w7: U3.34@-708.58,3405.55 -708.58,3436.42 -627.48,3517.52 -627.48,3617.09 P4.3@-637.48,3627.09 ; U3.34@-707.16,3431.14 cw(c-690.99,3431.14) -702.43,3442.58 ; P4.3@-643.46,3625.57 -627.48,3575.24 ; P4.3@-636.51,3627.26 -627.48,3575.24 ; P4.3@-635.88,3608.68 cw(c-656.17,3588.39) -627.48,3588.39 ; P4.3@-629.47,3628 -627.48,3575.24 ; -627.48,3540.11 cw(c-530.5,3540.11) P4.3@-599.08,3608.68 ; -627.48,3557.01 cw(c-547.4,3557.01) P4.3@-604.03,3613.63 ; -627.48,3573.91 cw(c-564.3,3573.91) P4.3@-608.98,3618.58 ; -627.48,3590.81 cw(c-581.2,3590.81) P4.3@-613.93,3623.53 ; P4.3@-622.46,3627.8 -627.48,3575.24 ; P4.3@-617.48,3627.09 -627.48,3575.24 ; P4.3@-612.59,3625.9 -627.48,3575.24 ; P4.3@-606.01,3623.48 -627.48,3575.24 ; P4.3@-599.75,3620.18 -627.48,3575.24 ; P4.3@-593.93,3616.01 -627.48,3575.24
TX2: R29.1 U3.21 | length 973.5
  Bottom Layer w6: R29.1@-1158.31,3309.96 ccw(c-1125.34,3342.93) -1125.34,3296.3 ; R29.1@-1155.27,3301.11 -1094.19,3296.3 ; R29.1@-1154.5,3307.09 -1094.19,3296.3 ; R29.1@-1154.07,3314.2 ccw(c-1110.86,3357.41) -1110.86,3296.3 ; R29.1@-1153.15,3312.95 -1094.19,3296.3 ; R29.1@-1152.17,3316.1 -1094.19,3296.3 ; R29.1@-1152.17,3317.09 -1131.38,3296.3 U3.21@-935.94,3296.3 ; R29.1@-1151.01,3319.2 -1094.19,3296.3 ; R29.1@-1149.83,3318.44 ccw(c-1096.37,3371.9) -1096.37,3296.3 ; R29.1@-1148.5,3324.66 -1094.19,3296.3 ; R29.1@-1145.58,3322.68 ccw(c-1081.89,3386.38) -1081.89,3296.3 ; R29.1@-1145.45,3329.86 -1094.19,3296.3 ; R29.1@-1141.34,3326.93 ccw(c-1067.4,3400.87) -1067.4,3296.3 ; -984.46,3296.3 U3.21@-961.53,3296.3
VCC_BAT: P11.1 pad.0@-1909.45,3718 pad.0@-1988.19,3718 S1.2 | length 3463.3
  Top Layer w60: S1.2@-1717.48,3470.24 S1.2@-1481.26,3470.24
  Top Layer w100: P11.1@-1978.03,3647.65 cw(c-1907.8,3575.98) -1906.78,3676.32 ; P11.1@-1962.13,3676.88 ccw(c-1961.18,3770.79) pad.0@-1895.45,3703.72 ; pad.0@-1923.73,3704 ccw(c-1856.66,3769.73) -1857.61,3675.83 ; -1811.65,3675.36 S1.2@-1481.26,3667.09 S1.2@-1717.48,3667.09 ; -1621.72,3673.44 P11.1@-1977.48,3647.09 S1.2@-1717.48,3667.09 ; S1.2@-1717.48,3667.09 -1982.48,3677.09 -1487.48,3672.09 S1.2@-1717.48,3667.09
  Bottom Layer w50: S1.2@-1717.48,3667.09 S1.2@-1492.48,3667.09 ; -1661.26,3667.09 S1.2@-1481.26,3667.09
  Bottom Layer w60: S1.2@-1717.48,3470.24 S1.2@-1481.26,3470.24
  Bottom Layer w100: -1587.48,3482.09 -1587.48,3667.09
VCCSBAT: C58.1 C64.1 P16.1 P22.3 P22.4 P23.2 P24.2 P25.2 P26.2 P28.3 P28.4 pad.0@-2500,831.26 pad.0@-2500,910 pad.1@-1050,474.33 pad.1@-1050,510 pad.1@-1687.5,1022.5 R32.1 R34.2 R54.2 U16.5 U18.5 | length 16020.1
  Top Layer w10: -875,725 -721.89,878.11 C58.1@-640,878.11 ; C58.1@-658.74,859.37 ccw(c-703.97,814.14) -703.97,878.11 ccw(c-703.97,942.08) C58.1@-658.74,896.85 ; C58.1@-651.66,866.45 ccw(c-679.82,838.29) -679.82,878.11 ccw(c-679.82,917.94) C58.1@-651.66,889.77 ; C58.1@-645.71,852.24 -701.5,878.11 ; C58.1@-645.71,903.98 -701.5,878.11 ; C58.1@-642.21,861.76 -701.5,878.11 ; C58.1@-642.21,894.46 -701.5,878.11 ; C58.1@-640.34,871.62 -701.5,878.11 ; C58.1@-640.34,884.6 -701.5,878.11
  Top Layer w15: R34.2@-2560.98,1137.28 -2550.32,1105.32 ; R34.2@-2557.96,1131.37 cw(c-2576.41,1112.93) -2550.32,1112.93 cw(c-2524.22,1112.93) R34.2@-2542.67,1131.37 ; R34.2@-2550.32,1139.02 -2550.32,1105.32 ; R34.2@-2550.32,1140 -2550.32,1105.32 ; R34.2@-2539.65,1137.28 -2550.32,1105.32 ; P16.1@-2396.02,852.35 -2340,933.04 ; P16.1@-2386.98,865.87 ccw(c-2500.38,979.28) -2340,979.28 ; P16.1@-2382.88,844.66 -2340,933.04 ; P16.1@-2376.37,855.27 ccw(c-2464.17,943.07) -2340,943.07 ; P16.1@-2368.86,839.15 -2340,933.04 ; P16.1@-2365.76,844.66 ccw(c-2427.96,906.86) -2340,906.86 ; P16.1@-2357.48,836.38 -2340,933.04 ; P16.1@-2346.38,836.38 -2340,842.76 U16.5@-2340,1144.88 ; P16.1@-2345.85,834.98 -2340,933.04 ; -2340,894.88 ccw(c-2298.98,894.88) P16.1@-2327.99,865.87 ; -2340,1078.23 U16.5@-2340,1136.02 ; -2340,1080 -2525,1080 -2550.32,1105.32 ; P16.1@-2330.79,835.24 -2340,933.04 ; P16.1@-2315.79,837.84 -2340,933.04
  Top Layer w20: pad.0@-2519.84,907.46 pad.0@-2500,831.26 ; pad.0@-2519.84,912.54 pad.0@-2519.84,833.8 ; pad.0@-2518.56,902.54 pad.0@-2480.16,833.8 ; pad.0@-2514.14,845.4 ccw(c-2548.28,879.54) -2500,879.54 ccw(c-2451.72,879.54) pad.0@-2485.86,845.4 ; pad.0@-2514.14,895.86 cw(c-2548.28,861.72) -2500,861.72 cw(c-2451.72,861.72) pad.0@-2485.86,895.86 ; pad.0@-2481.44,902.54 pad.0@-2519.84,833.8 ; pad.0@-2480.16,907.46 pad.0@-2500,831.26 ; pad.0@-2480.16,912.54 pad.0@-2480.16,833.8 ; U18.5@-1474.88,450 -1450,450 ; U18.5@-1465.12,447.35 cw(c-1457.86,426.12) -1441.99,441.99 ; -1395,288.01 ccw(c-1322.66,288.01) R54.2@-1373.81,236.86 ; R54.2@-1379.68,230.98 -1395,290 ; R54.2@-1373.81,224.13 cw(c-1359.63,209.94) -1359.63,230 cw(c-1359.63,250.06) R54.2@-1373.81,235.87 ; -1131.39,388.61 cw(c-1050,307.22) C64.1@-1050,422.32 ; -1102.43,418.97 C64.1@-1050,474.33 ; -1102.02,417.98 C64.1@-1050,474.33 ; -1097.25,422.75 cw(c-1050,375.5) C64.1@-1050,442.32 ; C64.1@-1050,443.82 -1122.41,397.59 ; C64.1@-1040.79,424.4 -1122.41,397.59 ; pad.0@-2519.84,833.8 pad.0@-2500,910 ; pad.0@-2500,831.26 pad.0@-2500,910 ; pad.0@-2500,910 pad.0@-2480.16,833.8 ; -1450,450 -1466.02,450 -1450,450 ; -1450,450 -1430,430 -1430,325 -1395,290 ; -1395,290 -1395,245.32 R54.2@-1379.68,230 -1240,230 -1165,305 -1165,355 -1060,460 C64.1@-1050,474.33 ; -1122.41,397.59 -1063.74,460.35 C64.1@-1050,474.33 ; C64.1@-1056.15,463.85 ccw(c-1066.64,474.33) -1051.81,474.33 cw(c-1066.64,474.33) C64.1@-1056.15,463.85
  Top Layer w70: -1725,735 -1720,735
  Top Layer w80: -1307.48,735 P23.2@-1577.48,735.12 ; -1087.48,735 P24.2@-1357.48,735.12 ; P23.2@-1577.48,735.12 -1627.48,735 P24.2@-1357.48,735.12 ; P23.2@-1577.48,735.12 P24.2@-1357.48,735.12 ; P23.2@-1577.48,735.12 -1720,735 -910,735 P25.2@-1137.48,735.12 ; P24.2@-1357.48,735.12 -1407.48,735 P25.2@-1137.48,735.12 ; P24.2@-1357.48,735.12 P25.2@-1137.48,735.12 ; P25.2@-1137.48,735.12 -1187.48,735 P26.2@-917.48,735.12 P25.2@-1137.48,735.12
  Top Layer w100: pad.0@-2500,851.26 cw(c-2500,745.66) -2425.33,820.33 ; -2443.05,838.05 ccw(c-2398.81,882.29) P16.1@-2356.95,835.79 ; -2227.03,735 P28.4@-1897.48,736.38 ; -2441.38,836.38 P16.1@-2357.48,836.38 ; -2441.38,836.38 P16.1@-2357.48,836.38 ; -2441.38,836.38 P16.1@-2357.48,836.38 ; -2441.38,836.38 pad.0@-2500,910 P16.1@-2357.48,836.38 ; -2441.38,836.38 -2346.38,836.38 -2245,735 ; -2441.38,836.38 -2485,880 P16.1@-2357.48,836.38 ; P16.1@-2357.48,836.38 -2245,735 ; -2245,735 P22.4@-2117.48,736.38 ; -2245,735 P22.4@-2117.48,736.38 ; -2245,735 P22.3@-2017.48,736.38 ; -2245,735 -1725,735 ; P22.4@-2117.48,736.38 P28.4@-1897.48,736.38 ; P22.4@-2117.48,736.38 P28.3@-1797.48,736.38 ; P22.4@-2117.48,736.38 P22.3@-2017.48,736.38 ; P22.4@-2117.48,736.38 -1787.93,735 P28.4@-1897.48,736.38 ; P22.3@-2017.48,736.38 P28.4@-1897.48,736.38 ; P22.3@-2017.48,736.38 P28.3@-1797.48,736.38 ; P22.3@-2017.48,736.38 -1725,735 ; P28.4@-1897.48,736.38 -1725,735 ; P28.4@-1897.48,736.38 -2127.04,735 P28.3@-1797.48,736.38 ; P28.4@-1897.48,736.38 P28.3@-1797.48,736.38 ; P28.4@-1897.48,736.38 -1725,735 ; P28.3@-1797.48,736.38 -1725,735 ; P28.3@-1797.48,736.38 -1725,735
  Bottom Layer w7: pad.1@-1693.2,1016.45 -1675,1005 ; pad.1@-1690,1020 -1675,1005 ; pad.1@-1687.5,1014.19 cw(c-1687.5,1006.2) -1681.85,1011.85 ; pad.1@-1687.5,1022.5 -1675,1005 ; pad.1@-1679.93,1025.93 -1675,1005 ; pad.1@-1679.83,1019.3 ccw(c-1669.86,1015.14) -1677.5,1007.5 ; -1675,785 -1675,1005
  Bottom Layer w20: P26.2@-929.78,719.34 -860,677.64 ; P26.2@-917.48,715.12 cw(c-917.48,666.83) -883.34,700.98 cw(c-849.2,735.12) P26.2@-897.48,735.12 ; P26.2@-917.48,735.12 -860,677.64 ; P26.2@-901.71,747.41 -860,677.64 ; pad.1@-1050,510 pad.1@-1050,474.33 pad.1@-1050,510 ; pad.1@-1050,510 -920,510 -860,570 -860,677.64
  Bottom Layer w100: pad.0@-2500,851.26 cw(c-2500,745.66) -2425.33,820.33 ; pad.0@-2500,910 P16.1@-2357.48,836.38 ; pad.0@-2500,910 -2480,875 ; pad.0@-2500,910 -2441.38,836.38 ; -2480,875 P16.1@-2357.48,836.38 ; -2480,875 -2441.38,836.38 ; -2441.38,836.38 P16.1@-2357.48,836.38 ; -2441.38,836.38 P16.1@-2357.48,836.38 ; -2441.38,836.38 P16.1@-2357.48,836.38 ; -2441.38,836.38 -2351.38,836.38 -2260,745 P16.1@-2357.48,836.38
VIN9V: C12.1 D3.2 pad.1@-1582.48,2652.09 pad.11@-1167.17,3487.09 R5.1 R7.2 U4.5 | length 3132.2
  Top Layer w7: -1617.48,2742.09 -1582.48,2707.09 pad.1@-1582.48,2652.09 ; pad.1@-1590.72,2653.14 -1582.48,2684.9 pad.1@-1574.24,2653.14 ; pad.1@-1588.36,2657.96 ccw(c-1602.54,2672.15) -1582.48,2672.15 ccw(c-1562.42,2672.15) pad.1@-1576.6,2657.96
  Top Layer w30: U4.5@-1982.36,2707.09 -1937.48,2707.09 U4.5@-1973.5,2707.09 ; C12.1@-1477.48,2897.09 C12.1@-1447.48,2897.09
  Top Layer w50: -1937.48,2707.09 -1677.48,2707.09 ; -1662.48,2707.09 C12.1@-1457.48,2912.09 ; -1589.4,2780.17 C12.1@-1452.32,2907.09 ; C12.1@-1480.75,2888.81 cw(c-1452.32,2860.39) C12.1@-1452.32,2900.59
  Top Layer w60: C12.1@-1452.32,2907.09 -1447.48,2942.09 -1387.48,3002.09 ; C12.1@-1421.81,2907.09 -1387.48,3002.09 ; C12.1@-1390.18,2908.08 cw(c-1339.05,2953.65) -1387.48,3002.09 ; D3.2@-1135.62,3486.79 ccw(c-1071.21,3473.75) -1117.68,3427.29 ; -1387.48,3002.09 -1237.48,3002.09 -1097.48,3142.09 -1097.48,3407.09 ; pad.11@-1167.17,3487.09 D3.2@-1150.87,3460.47 ; pad.11@-1167.17,3487.09 D3.2@-1150.87,3487.09 D3.2@-1150.87,3460.47 ; pad.11@-1167.17,3487.09 -1137.09,3487.09 -1097.48,3407.09 ; pad.11@-1167.17,3487.09 -1097.48,3407.09 ; pad.11@-1167.17,3487.09 D3.2@-1150.87,3460.47 ; pad.11@-1167.17,3487.09 -1097.48,3407.09 ; D3.2@-1150.87,3460.47 -1097.48,3407.09 ; D3.2@-1155.7,3498.56 cw(c-1167.36,3486.9) -1150.87,3486.9 ccw(c-1167.36,3486.9) D3.2@-1155.7,3498.56
  Bottom Layer w7: R7.2@-1700.47,2620.39 -1655.16,2620.39 -1623.46,2652.09 pad.1@-1582.48,2652.09 ; R7.2@-1699.49,2620.39 -1660.18,2620.39 ; R7.2@-1698.71,2612.63 -1660.18,2620.39 ; R7.2@-1698.71,2628.16 -1660.18,2620.39 ; R7.2@-1696.7,2605.85 -1660.18,2620.39 ; R7.2@-1696.7,2634.94 -1660.18,2620.39 ; R7.2@-1693.97,2614.87 cw(c-1680.64,2601.55) -1680.64,2620.39 cw(c-1680.64,2639.24) R7.2@-1693.97,2625.91 ; R7.2@-1689.02,2609.92 cw(c-1663.74,2584.65) -1663.74,2620.39 cw(c-1663.74,2656.14) R7.2@-1689.02,2630.86 ; pad.1@-1588.36,2646.21 ccw(c-1602.54,2632.02) -1602.54,2652.09 ccw(c-1602.54,2672.15) pad.1@-1588.36,2657.96 ; pad.1@-1583.53,2643.84 -1615.29,2652.09 pad.1@-1583.53,2660.33